# EAGLE board NCP1402_3.3V_Breakout-Panel-v10 (EAGLE 6.5.0)
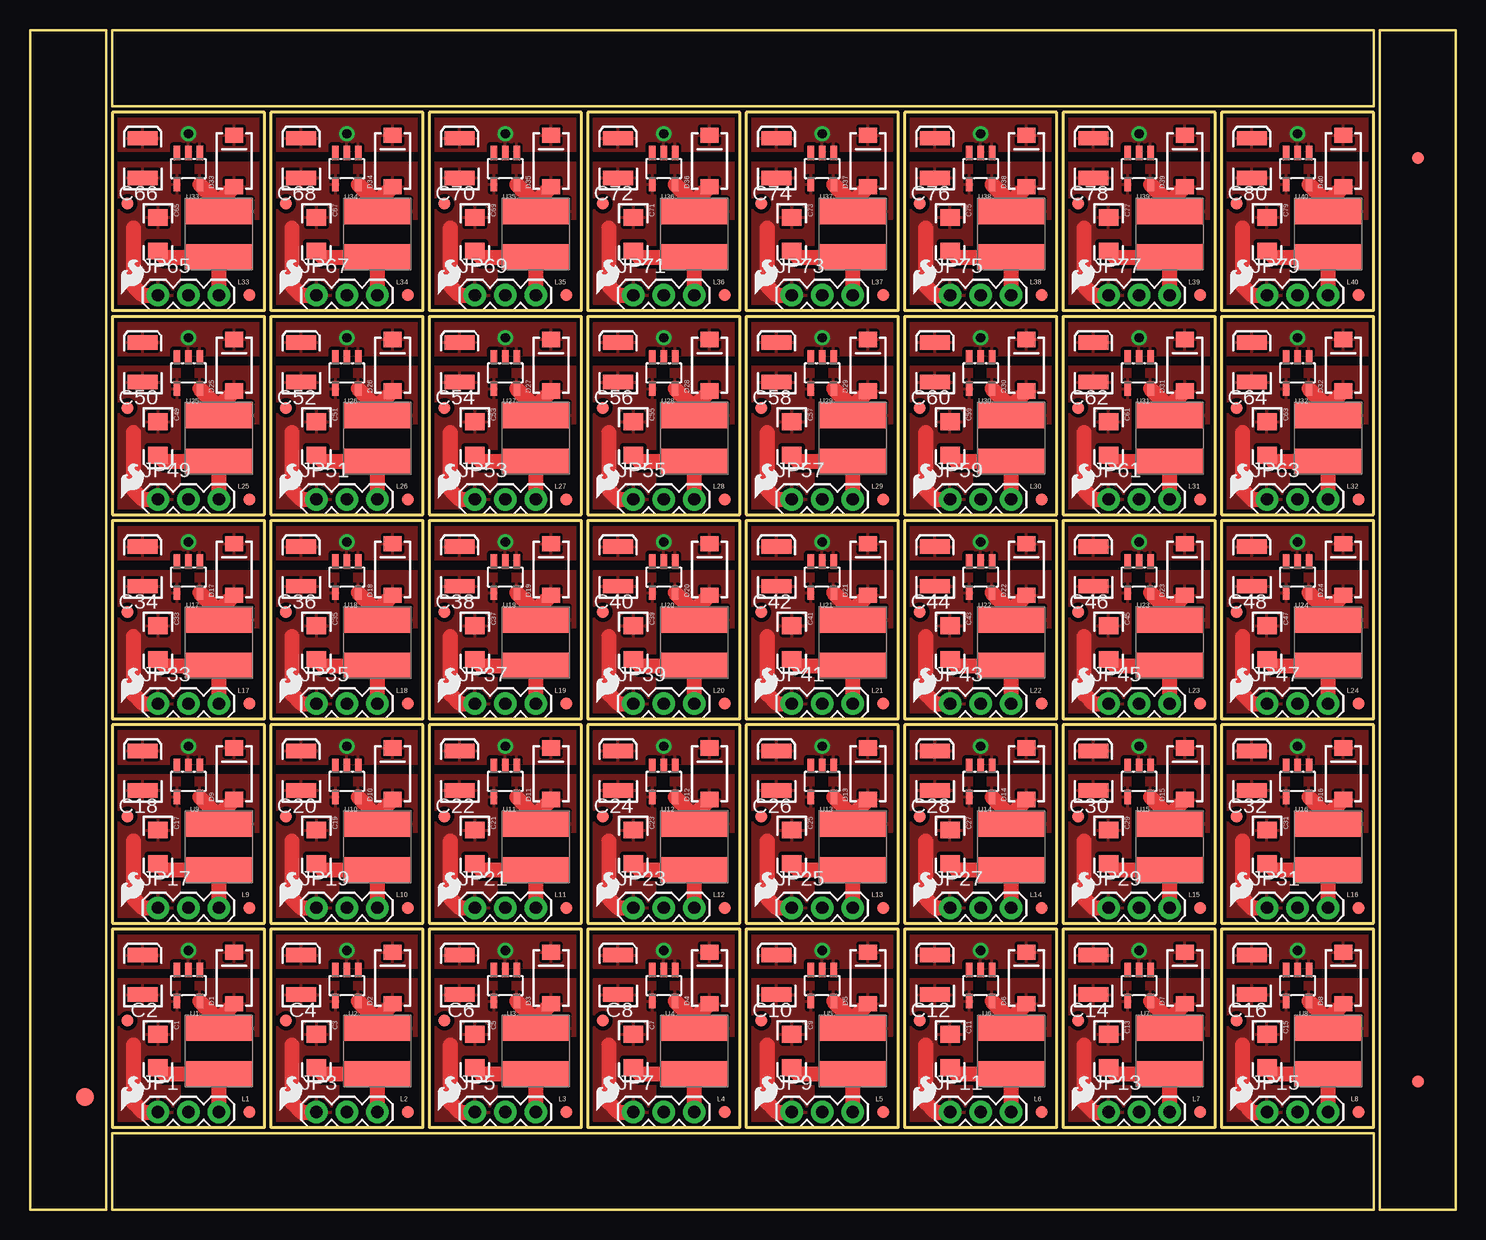
[diagram p0: board, top side]
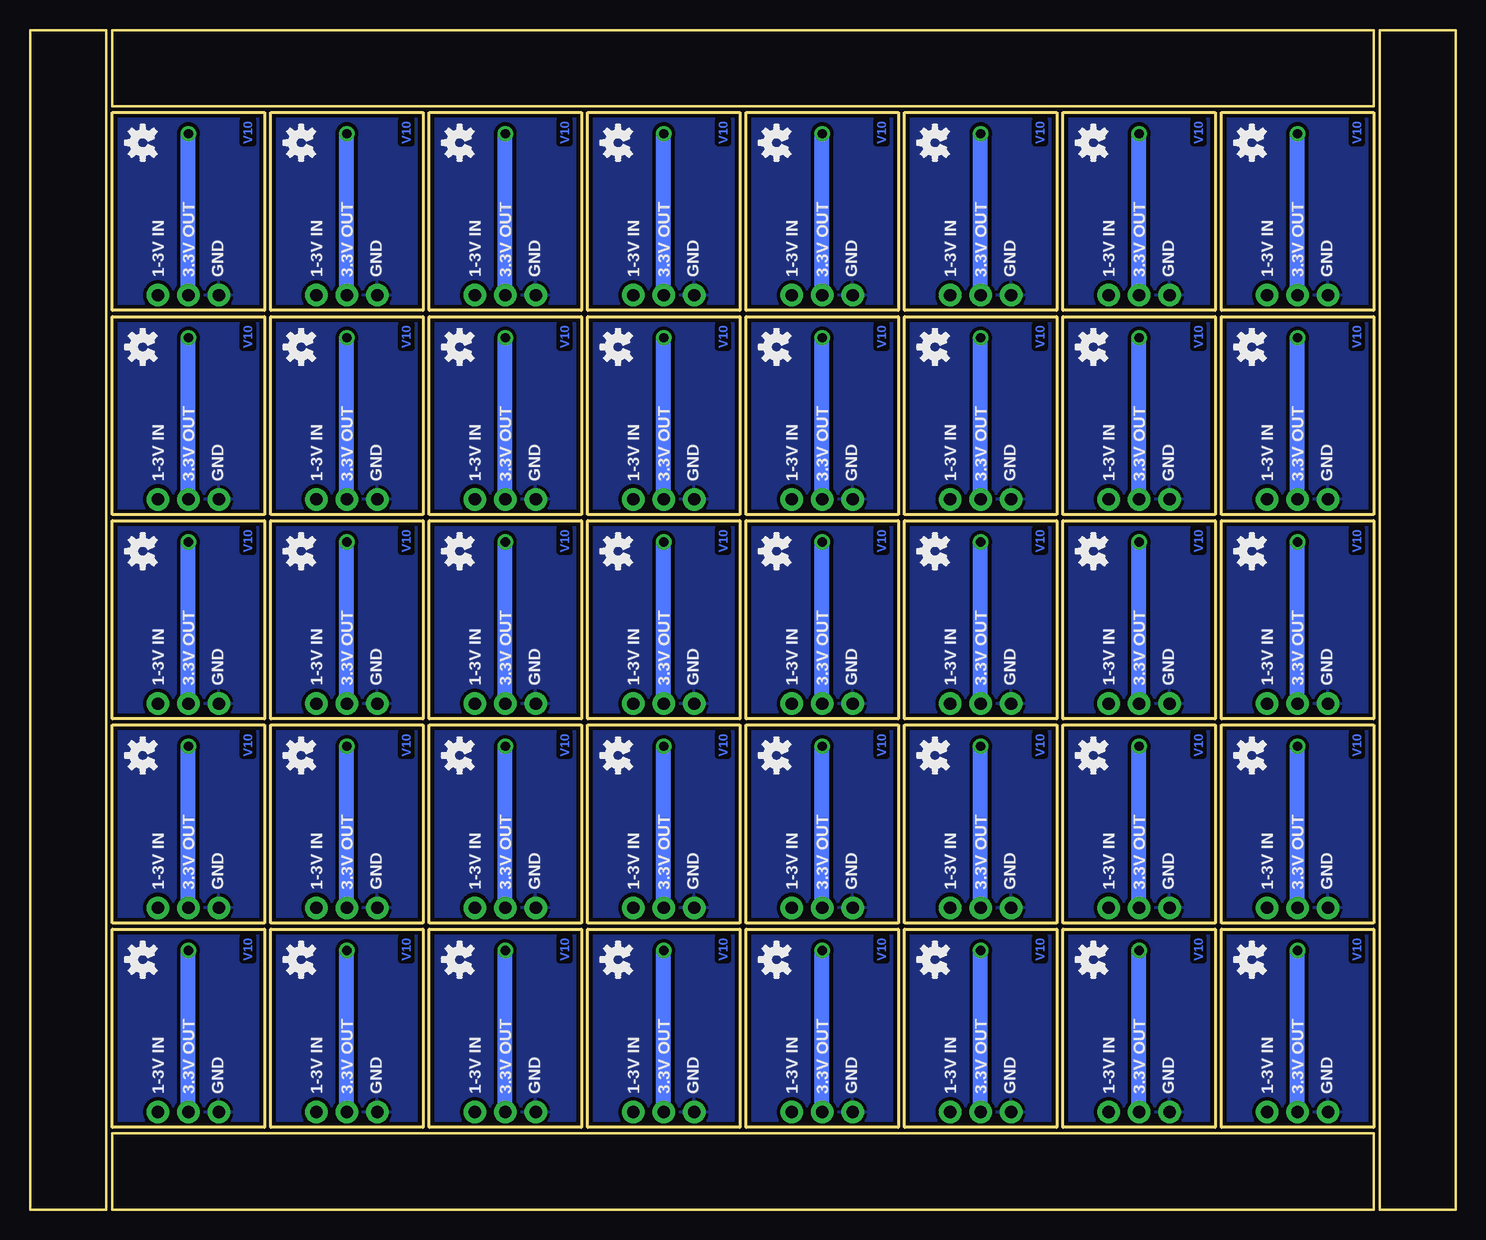
[diagram p1: board, bottom side, seen from below]

Size 118.87 x 98.3 mm. Coordinates in mm from the lower left corner, seen from the top.
Outline: 180 segments
Copper layers (1*16): Top 0.035mm / dielectric 1.5mm / Bottom 0.035mm
Design rules "SparkFun-2-layer *": minimum track width 7mil, minimum drill 15mil, track to track 8mil, track to pad 8mil, pad to pad 8mil, via to via 8mil, smd to smd 8mil, copper to edge 8mil, drill to drill 8mil, minimum pad ring 12mil, minimum via ring 10mil, stop-mask expansion 4mil, vias tented up to drill 31mil, thermal gap 10mil

## Footprints (pad centres in the part's own frame; a part is rotated, then mirrored left to right if it is on the bottom)
EIA3216 = smd 1.4 x 1.6: A 1.4,0; C -1.4,0
EIA3528 = smd 1.2 x 2.5: A 1.65,0; C -1.65,0
SMA-DIODE = smd 1.27 x 1.47: A -2.15,0; C 2.15,0
FIDUCIAL-1.5X3 = smd 1.5 x 1.5: 1 0,0
FIDUCIAL-1X2 = smd 1 x 1: 1 0,0
1X03 = drill 1.016 pad 1.88: 1 0,0; 2 2.54,0; 3 5.08,0
CR54 = smd 5.5 x 2.15: P$1 0,1.92; P$2 0,-1.92
SOT23-5 = smd 0.55 x 1.2: 1 -0.95,-1.3; 2 0,-1.3; 3 0.95,-1.3; 4 0.95,1.3; 5 -0.95,1.3

## Placement (x,y rotation side)
C1  10uF  [EIA3216]  10.67,13.21 270 top
C2  68uF  [EIA3528]  9.4,19.56 90 top
C3  10uF  [EIA3216]  23.88,13.21 270 top
C4  68uF  [EIA3528]  22.61,19.56 90 top
C5  10uF  [EIA3216]  37.08,13.21 270 top
C6  68uF  [EIA3528]  35.81,19.56 90 top
C7  10uF  [EIA3216]  50.29,13.21 270 top
C8  68uF  [EIA3528]  49.02,19.56 90 top
C9  10uF  [EIA3216]  63.5,13.21 270 top
C10  68uF  [EIA3528]  62.23,19.56 90 top
C11  10uF  [EIA3216]  76.71,13.21 270 top
C12  68uF  [EIA3528]  75.44,19.56 90 top
C13  10uF  [EIA3216]  89.92,13.21 270 top
C14  68uF  [EIA3528]  88.65,19.56 90 top
C15  10uF  [EIA3216]  103.12,13.21 270 top
C16  68uF  [EIA3528]  101.85,19.56 90 top
C17  10uF  [EIA3216]  10.67,30.23 270 top
C18  68uF  [EIA3528]  9.4,36.58 90 top
C19  10uF  [EIA3216]  23.88,30.23 270 top
C20  68uF  [EIA3528]  22.61,36.58 90 top
C21  10uF  [EIA3216]  37.08,30.23 270 top
C22  68uF  [EIA3528]  35.81,36.58 90 top
C23  10uF  [EIA3216]  50.29,30.23 270 top
C24  68uF  [EIA3528]  49.02,36.58 90 top
C25  10uF  [EIA3216]  63.5,30.23 270 top
C26  68uF  [EIA3528]  62.23,36.58 90 top
C27  10uF  [EIA3216]  76.71,30.23 270 top
C28  68uF  [EIA3528]  75.44,36.58 90 top
C29  10uF  [EIA3216]  89.92,30.23 270 top
C30  68uF  [EIA3528]  88.65,36.58 90 top
C31  10uF  [EIA3216]  103.12,30.23 270 top
C32  68uF  [EIA3528]  101.85,36.58 90 top
C33  10uF  [EIA3216]  10.67,47.24 270 top
C34  68uF  [EIA3528]  9.4,53.59 90 top
C35  10uF  [EIA3216]  23.88,47.24 270 top
C36  68uF  [EIA3528]  22.61,53.59 90 top
C37  10uF  [EIA3216]  37.08,47.24 270 top
C38  68uF  [EIA3528]  35.81,53.59 90 top
C39  10uF  [EIA3216]  50.29,47.24 270 top
C40  68uF  [EIA3528]  49.02,53.59 90 top
C41  10uF  [EIA3216]  63.5,47.24 270 top
C42  68uF  [EIA3528]  62.23,53.59 90 top
C43  10uF  [EIA3216]  76.71,47.24 270 top
C44  68uF  [EIA3528]  75.44,53.59 90 top
C45  10uF  [EIA3216]  89.92,47.24 270 top
C46  68uF  [EIA3528]  88.65,53.59 90 top
C47  10uF  [EIA3216]  103.12,47.24 270 top
C48  68uF  [EIA3528]  101.85,53.59 90 top
C49  10uF  [EIA3216]  10.67,64.26 270 top
C50  68uF  [EIA3528]  9.4,70.61 90 top
C51  10uF  [EIA3216]  23.88,64.26 270 top
C52  68uF  [EIA3528]  22.61,70.61 90 top
C53  10uF  [EIA3216]  37.08,64.26 270 top
C54  68uF  [EIA3528]  35.81,70.61 90 top
C55  10uF  [EIA3216]  50.29,64.26 270 top
C56  68uF  [EIA3528]  49.02,70.61 90 top
C57  10uF  [EIA3216]  63.5,64.26 270 top
C58  68uF  [EIA3528]  62.23,70.61 90 top
C59  10uF  [EIA3216]  76.71,64.26 270 top
C60  68uF  [EIA3528]  75.44,70.61 90 top
C61  10uF  [EIA3216]  89.92,64.26 270 top
C62  68uF  [EIA3528]  88.65,70.61 90 top
C63  10uF  [EIA3216]  103.12,64.26 270 top
C64  68uF  [EIA3528]  101.85,70.61 90 top
C65  10uF  [EIA3216]  10.67,81.28 270 top
C66  68uF  [EIA3528]  9.4,87.63 90 top
C67  10uF  [EIA3216]  23.88,81.28 270 top
C68  68uF  [EIA3528]  22.61,87.63 90 top
C69  10uF  [EIA3216]  37.08,81.28 270 top
C70  68uF  [EIA3528]  35.81,87.63 90 top
C71  10uF  [EIA3216]  50.29,81.28 270 top
C72  68uF  [EIA3528]  49.02,87.63 90 top
C73  10uF  [EIA3216]  63.5,81.28 270 top
C74  68uF  [EIA3528]  62.23,87.63 90 top
C75  10uF  [EIA3216]  76.71,81.28 270 top
C76  68uF  [EIA3528]  75.44,87.63 90 top
C77  10uF  [EIA3216]  89.92,81.28 270 top
C78  68uF  [EIA3528]  88.65,87.63 90 top
C79  10uF  [EIA3216]  103.12,81.28 270 top
C80  68uF  [EIA3528]  101.85,87.63 90 top
D1  MBRA140  [SMA-DIODE]  17.02,19.3 90 top
D2  MBRA140  [SMA-DIODE]  30.23,19.3 90 top
D3  MBRA140  [SMA-DIODE]  43.43,19.3 90 top
D4  MBRA140  [SMA-DIODE]  56.64,19.3 90 top
D5  MBRA140  [SMA-DIODE]  69.85,19.3 90 top
D6  MBRA140  [SMA-DIODE]  83.06,19.3 90 top
D7  MBRA140  [SMA-DIODE]  96.27,19.3 90 top
D8  MBRA140  [SMA-DIODE]  109.47,19.3 90 top
D9  MBRA140  [SMA-DIODE]  17.02,36.32 90 top
D10  MBRA140  [SMA-DIODE]  30.23,36.32 90 top
D11  MBRA140  [SMA-DIODE]  43.43,36.32 90 top
D12  MBRA140  [SMA-DIODE]  56.64,36.32 90 top
D13  MBRA140  [SMA-DIODE]  69.85,36.32 90 top
D14  MBRA140  [SMA-DIODE]  83.06,36.32 90 top
D15  MBRA140  [SMA-DIODE]  96.27,36.32 90 top
D16  MBRA140  [SMA-DIODE]  109.47,36.32 90 top
D17  MBRA140  [SMA-DIODE]  17.02,53.34 90 top
D18  MBRA140  [SMA-DIODE]  30.23,53.34 90 top
D19  MBRA140  [SMA-DIODE]  43.43,53.34 90 top
D20  MBRA140  [SMA-DIODE]  56.64,53.34 90 top
D21  MBRA140  [SMA-DIODE]  69.85,53.34 90 top
D22  MBRA140  [SMA-DIODE]  83.06,53.34 90 top
D23  MBRA140  [SMA-DIODE]  96.27,53.34 90 top
D24  MBRA140  [SMA-DIODE]  109.47,53.34 90 top
D25  MBRA140  [SMA-DIODE]  17.02,70.36 90 top
D26  MBRA140  [SMA-DIODE]  30.23,70.36 90 top
D27  MBRA140  [SMA-DIODE]  43.43,70.36 90 top
D28  MBRA140  [SMA-DIODE]  56.64,70.36 90 top
D29  MBRA140  [SMA-DIODE]  69.85,70.36 90 top
D30  MBRA140  [SMA-DIODE]  83.06,70.36 90 top
D31  MBRA140  [SMA-DIODE]  96.27,70.36 90 top
D32  MBRA140  [SMA-DIODE]  109.47,70.36 90 top
D33  MBRA140  [SMA-DIODE]  17.02,87.38 90 top
D34  MBRA140  [SMA-DIODE]  30.23,87.38 90 top
D35  MBRA140  [SMA-DIODE]  43.43,87.38 90 top
D36  MBRA140  [SMA-DIODE]  56.64,87.38 90 top
D37  MBRA140  [SMA-DIODE]  69.85,87.38 90 top
D38  MBRA140  [SMA-DIODE]  83.06,87.38 90 top
D39  MBRA140  [SMA-DIODE]  96.27,87.38 90 top
D40  MBRA140  [SMA-DIODE]  109.47,87.38 90 top
E$1  [FIDUCIAL-1.5X3]  4.57,9.4 0 top
E$4  [FIDUCIAL-1X2]  115.7,10.67 0 top
E$6  [FIDUCIAL-1X2]  115.7,87.63 180 top
FID1  FIDUCIAL1X2  [FIDUCIAL-1X2]  18.29,8.13 0 top
FID2  FIDUCIAL1X2  [FIDUCIAL-1X2]  8.13,15.75 0 top
FID3  FIDUCIAL1X2  [FIDUCIAL-1X2]  31.5,8.13 0 top
FID4  FIDUCIAL1X2  [FIDUCIAL-1X2]  21.34,15.75 0 top
FID5  FIDUCIAL1X2  [FIDUCIAL-1X2]  44.7,8.13 0 top
FID6  FIDUCIAL1X2  [FIDUCIAL-1X2]  34.54,15.75 0 top
FID7  FIDUCIAL1X2  [FIDUCIAL-1X2]  57.91,8.13 0 top
FID8  FIDUCIAL1X2  [FIDUCIAL-1X2]  47.75,15.75 0 top
FID9  FIDUCIAL1X2  [FIDUCIAL-1X2]  71.12,8.13 0 top
FID10  FIDUCIAL1X2  [FIDUCIAL-1X2]  60.96,15.75 0 top
FID11  FIDUCIAL1X2  [FIDUCIAL-1X2]  84.33,8.13 0 top
FID12  FIDUCIAL1X2  [FIDUCIAL-1X2]  74.17,15.75 0 top
FID13  FIDUCIAL1X2  [FIDUCIAL-1X2]  97.54,8.13 0 top
FID14  FIDUCIAL1X2  [FIDUCIAL-1X2]  87.38,15.75 0 top
FID15  FIDUCIAL1X2  [FIDUCIAL-1X2]  110.74,8.13 0 top
FID16  FIDUCIAL1X2  [FIDUCIAL-1X2]  100.58,15.75 0 top
FID17  FIDUCIAL1X2  [FIDUCIAL-1X2]  18.29,25.15 0 top
FID18  FIDUCIAL1X2  [FIDUCIAL-1X2]  8.13,32.77 0 top
FID19  FIDUCIAL1X2  [FIDUCIAL-1X2]  31.5,25.15 0 top
FID20  FIDUCIAL1X2  [FIDUCIAL-1X2]  21.34,32.77 0 top
FID21  FIDUCIAL1X2  [FIDUCIAL-1X2]  44.7,25.15 0 top
FID22  FIDUCIAL1X2  [FIDUCIAL-1X2]  34.54,32.77 0 top
FID23  FIDUCIAL1X2  [FIDUCIAL-1X2]  57.91,25.15 0 top
FID24  FIDUCIAL1X2  [FIDUCIAL-1X2]  47.75,32.77 0 top
FID25  FIDUCIAL1X2  [FIDUCIAL-1X2]  71.12,25.15 0 top
FID26  FIDUCIAL1X2  [FIDUCIAL-1X2]  60.96,32.77 0 top
FID27  FIDUCIAL1X2  [FIDUCIAL-1X2]  84.33,25.15 0 top
FID28  FIDUCIAL1X2  [FIDUCIAL-1X2]  74.17,32.77 0 top
FID29  FIDUCIAL1X2  [FIDUCIAL-1X2]  97.54,25.15 0 top
FID30  FIDUCIAL1X2  [FIDUCIAL-1X2]  87.38,32.77 0 top
FID31  FIDUCIAL1X2  [FIDUCIAL-1X2]  110.74,25.15 0 top
FID32  FIDUCIAL1X2  [FIDUCIAL-1X2]  100.58,32.77 0 top
FID33  FIDUCIAL1X2  [FIDUCIAL-1X2]  18.29,42.16 0 top
FID34  FIDUCIAL1X2  [FIDUCIAL-1X2]  8.13,49.78 0 top
FID35  FIDUCIAL1X2  [FIDUCIAL-1X2]  31.5,42.16 0 top
FID36  FIDUCIAL1X2  [FIDUCIAL-1X2]  21.34,49.78 0 top
FID37  FIDUCIAL1X2  [FIDUCIAL-1X2]  44.7,42.16 0 top
FID38  FIDUCIAL1X2  [FIDUCIAL-1X2]  34.54,49.78 0 top
FID39  FIDUCIAL1X2  [FIDUCIAL-1X2]  57.91,42.16 0 top
FID40  FIDUCIAL1X2  [FIDUCIAL-1X2]  47.75,49.78 0 top
FID41  FIDUCIAL1X2  [FIDUCIAL-1X2]  71.12,42.16 0 top
FID42  FIDUCIAL1X2  [FIDUCIAL-1X2]  60.96,49.78 0 top
FID43  FIDUCIAL1X2  [FIDUCIAL-1X2]  84.33,42.16 0 top
FID44  FIDUCIAL1X2  [FIDUCIAL-1X2]  74.17,49.78 0 top
FID45  FIDUCIAL1X2  [FIDUCIAL-1X2]  97.54,42.16 0 top
FID46  FIDUCIAL1X2  [FIDUCIAL-1X2]  87.38,49.78 0 top
FID47  FIDUCIAL1X2  [FIDUCIAL-1X2]  110.74,42.16 0 top
FID48  FIDUCIAL1X2  [FIDUCIAL-1X2]  100.58,49.78 0 top
FID49  FIDUCIAL1X2  [FIDUCIAL-1X2]  18.29,59.18 0 top
FID50  FIDUCIAL1X2  [FIDUCIAL-1X2]  8.13,66.8 0 top
FID51  FIDUCIAL1X2  [FIDUCIAL-1X2]  31.5,59.18 0 top
FID52  FIDUCIAL1X2  [FIDUCIAL-1X2]  21.34,66.8 0 top
FID53  FIDUCIAL1X2  [FIDUCIAL-1X2]  44.7,59.18 0 top
FID54  FIDUCIAL1X2  [FIDUCIAL-1X2]  34.54,66.8 0 top
FID55  FIDUCIAL1X2  [FIDUCIAL-1X2]  57.91,59.18 0 top
FID56  FIDUCIAL1X2  [FIDUCIAL-1X2]  47.75,66.8 0 top
FID57  FIDUCIAL1X2  [FIDUCIAL-1X2]  71.12,59.18 0 top
FID58  FIDUCIAL1X2  [FIDUCIAL-1X2]  60.96,66.8 0 top
FID59  FIDUCIAL1X2  [FIDUCIAL-1X2]  84.33,59.18 0 top
FID60  FIDUCIAL1X2  [FIDUCIAL-1X2]  74.17,66.8 0 top
FID61  FIDUCIAL1X2  [FIDUCIAL-1X2]  97.54,59.18 0 top
FID62  FIDUCIAL1X2  [FIDUCIAL-1X2]  87.38,66.8 0 top
FID63  FIDUCIAL1X2  [FIDUCIAL-1X2]  110.74,59.18 0 top
FID64  FIDUCIAL1X2  [FIDUCIAL-1X2]  100.58,66.8 0 top
FID65  FIDUCIAL1X2  [FIDUCIAL-1X2]  18.29,76.2 0 top
FID66  FIDUCIAL1X2  [FIDUCIAL-1X2]  8.13,83.82 0 top
FID67  FIDUCIAL1X2  [FIDUCIAL-1X2]  31.5,76.2 0 top
FID68  FIDUCIAL1X2  [FIDUCIAL-1X2]  21.34,83.82 0 top
FID69  FIDUCIAL1X2  [FIDUCIAL-1X2]  44.7,76.2 0 top
FID70  FIDUCIAL1X2  [FIDUCIAL-1X2]  34.54,83.82 0 top
FID71  FIDUCIAL1X2  [FIDUCIAL-1X2]  57.91,76.2 0 top
FID72  FIDUCIAL1X2  [FIDUCIAL-1X2]  47.75,83.82 0 top
FID73  FIDUCIAL1X2  [FIDUCIAL-1X2]  71.12,76.2 0 top
FID74  FIDUCIAL1X2  [FIDUCIAL-1X2]  60.96,83.82 0 top
FID75  FIDUCIAL1X2  [FIDUCIAL-1X2]  84.33,76.2 0 top
FID76  FIDUCIAL1X2  [FIDUCIAL-1X2]  74.17,83.82 0 top
FID77  FIDUCIAL1X2  [FIDUCIAL-1X2]  97.54,76.2 0 top
FID78  FIDUCIAL1X2  [FIDUCIAL-1X2]  87.38,83.82 0 top
FID79  FIDUCIAL1X2  [FIDUCIAL-1X2]  110.74,76.2 0 top
FID80  FIDUCIAL1X2  [FIDUCIAL-1X2]  100.58,83.82 0 top
JP1  [1X03]  10.67,8.13 0 top
JP2  LOGO-SFESK  [SFE-LOGO-FLAME]  7.62,8.26 0 top
JP3  [1X03]  23.88,8.13 0 top
JP4  LOGO-SFESK  [SFE-LOGO-FLAME]  20.83,8.26 0 top
JP5  [1X03]  37.08,8.13 0 top
JP6  LOGO-SFESK  [SFE-LOGO-FLAME]  34.04,8.26 0 top
JP7  [1X03]  50.29,8.13 0 top
JP8  LOGO-SFESK  [SFE-LOGO-FLAME]  47.24,8.26 0 top
JP9  [1X03]  63.5,8.13 0 top
JP10  LOGO-SFESK  [SFE-LOGO-FLAME]  60.45,8.26 0 top
JP11  [1X03]  76.71,8.13 0 top
JP12  LOGO-SFESK  [SFE-LOGO-FLAME]  73.66,8.26 0 top
JP13  [1X03]  89.92,8.13 0 top
JP14  LOGO-SFESK  [SFE-LOGO-FLAME]  86.87,8.26 0 top
JP15  [1X03]  103.12,8.13 0 top
JP16  LOGO-SFESK  [SFE-LOGO-FLAME]  100.08,8.26 0 top
JP17  [1X03]  10.67,25.15 0 top
JP18  LOGO-SFESK  [SFE-LOGO-FLAME]  7.62,25.27 0 top
JP19  [1X03]  23.88,25.15 0 top
JP20  LOGO-SFESK  [SFE-LOGO-FLAME]  20.83,25.27 0 top
JP21  [1X03]  37.08,25.15 0 top
JP22  LOGO-SFESK  [SFE-LOGO-FLAME]  34.04,25.27 0 top
JP23  [1X03]  50.29,25.15 0 top
JP24  LOGO-SFESK  [SFE-LOGO-FLAME]  47.24,25.27 0 top
JP25  [1X03]  63.5,25.15 0 top
JP26  LOGO-SFESK  [SFE-LOGO-FLAME]  60.45,25.27 0 top
JP27  [1X03]  76.71,25.15 0 top
JP28  LOGO-SFESK  [SFE-LOGO-FLAME]  73.66,25.27 0 top
JP29  [1X03]  89.92,25.15 0 top
JP30  LOGO-SFESK  [SFE-LOGO-FLAME]  86.87,25.27 0 top
JP31  [1X03]  103.12,25.15 0 top
JP32  LOGO-SFESK  [SFE-LOGO-FLAME]  100.08,25.27 0 top
JP33  [1X03]  10.67,42.16 0 top
JP34  LOGO-SFESK  [SFE-LOGO-FLAME]  7.62,42.29 0 top
JP35  [1X03]  23.88,42.16 0 top
JP36  LOGO-SFESK  [SFE-LOGO-FLAME]  20.83,42.29 0 top
JP37  [1X03]  37.08,42.16 0 top
JP38  LOGO-SFESK  [SFE-LOGO-FLAME]  34.04,42.29 0 top
JP39  [1X03]  50.29,42.16 0 top
JP40  LOGO-SFESK  [SFE-LOGO-FLAME]  47.24,42.29 0 top
JP41  [1X03]  63.5,42.16 0 top
JP42  LOGO-SFESK  [SFE-LOGO-FLAME]  60.45,42.29 0 top
JP43  [1X03]  76.71,42.16 0 top
JP44  LOGO-SFESK  [SFE-LOGO-FLAME]  73.66,42.29 0 top
JP45  [1X03]  89.92,42.16 0 top
JP46  LOGO-SFESK  [SFE-LOGO-FLAME]  86.87,42.29 0 top
JP47  [1X03]  103.12,42.16 0 top
JP48  LOGO-SFESK  [SFE-LOGO-FLAME]  100.08,42.29 0 top
JP49  [1X03]  10.67,59.18 0 top
JP50  LOGO-SFESK  [SFE-LOGO-FLAME]  7.62,59.31 0 top
JP51  [1X03]  23.88,59.18 0 top
JP52  LOGO-SFESK  [SFE-LOGO-FLAME]  20.83,59.31 0 top
JP53  [1X03]  37.08,59.18 0 top
JP54  LOGO-SFESK  [SFE-LOGO-FLAME]  34.04,59.31 0 top
JP55  [1X03]  50.29,59.18 0 top
JP56  LOGO-SFESK  [SFE-LOGO-FLAME]  47.24,59.31 0 top
JP57  [1X03]  63.5,59.18 0 top
JP58  LOGO-SFESK  [SFE-LOGO-FLAME]  60.45,59.31 0 top
JP59  [1X03]  76.71,59.18 0 top
JP60  LOGO-SFESK  [SFE-LOGO-FLAME]  73.66,59.31 0 top
JP61  [1X03]  89.92,59.18 0 top
JP62  LOGO-SFESK  [SFE-LOGO-FLAME]  86.87,59.31 0 top
JP63  [1X03]  103.12,59.18 0 top
JP64  LOGO-SFESK  [SFE-LOGO-FLAME]  100.08,59.31 0 top
JP65  [1X03]  10.67,76.2 0 top
JP66  LOGO-SFESK  [SFE-LOGO-FLAME]  7.62,76.33 0 top
JP67  [1X03]  23.88,76.2 0 top
JP68  LOGO-SFESK  [SFE-LOGO-FLAME]  20.83,76.33 0 top
JP69  [1X03]  37.08,76.2 0 top
JP70  LOGO-SFESK  [SFE-LOGO-FLAME]  34.04,76.33 0 top
JP71  [1X03]  50.29,76.2 0 top
JP72  LOGO-SFESK  [SFE-LOGO-FLAME]  47.24,76.33 0 top
JP73  [1X03]  63.5,76.2 0 top
JP74  LOGO-SFESK  [SFE-LOGO-FLAME]  60.45,76.33 0 top
JP75  [1X03]  76.71,76.2 0 top
JP76  LOGO-SFESK  [SFE-LOGO-FLAME]  73.66,76.33 0 top
JP77  [1X03]  89.92,76.2 0 top
JP78  LOGO-SFESK  [SFE-LOGO-FLAME]  86.87,76.33 0 top
JP79  [1X03]  103.12,76.2 0 top
JP80  LOGO-SFESK  [SFE-LOGO-FLAME]  100.08,76.33 0 top
L1  47uH  [CR54]  15.75,13.21 180 top
L2  47uH  [CR54]  28.96,13.21 180 top
L3  47uH  [CR54]  42.16,13.21 180 top
L4  47uH  [CR54]  55.37,13.21 180 top
L5  47uH  [CR54]  68.58,13.21 180 top
L6  47uH  [CR54]  81.79,13.21 180 top
L7  47uH  [CR54]  95,13.21 180 top
L8  47uH  [CR54]  108.2,13.21 180 top
L9  47uH  [CR54]  15.75,30.23 180 top
L10  47uH  [CR54]  28.96,30.23 180 top
L11  47uH  [CR54]  42.16,30.23 180 top
L12  47uH  [CR54]  55.37,30.23 180 top
L13  47uH  [CR54]  68.58,30.23 180 top
L14  47uH  [CR54]  81.79,30.23 180 top
L15  47uH  [CR54]  95,30.23 180 top
L16  47uH  [CR54]  108.2,30.23 180 top
L17  47uH  [CR54]  15.75,47.24 180 top
L18  47uH  [CR54]  28.96,47.24 180 top
L19  47uH  [CR54]  42.16,47.24 180 top
L20  47uH  [CR54]  55.37,47.24 180 top
L21  47uH  [CR54]  68.58,47.24 180 top
L22  47uH  [CR54]  81.79,47.24 180 top
L23  47uH  [CR54]  95,47.24 180 top
L24  47uH  [CR54]  108.2,47.24 180 top
L25  47uH  [CR54]  15.75,64.26 180 top
L26  47uH  [CR54]  28.96,64.26 180 top
L27  47uH  [CR54]  42.16,64.26 180 top
L28  47uH  [CR54]  55.37,64.26 180 top
L29  47uH  [CR54]  68.58,64.26 180 top
L30  47uH  [CR54]  81.79,64.26 180 top
L31  47uH  [CR54]  95,64.26 180 top
L32  47uH  [CR54]  108.2,64.26 180 top
L33  47uH  [CR54]  15.75,81.28 180 top
L34  47uH  [CR54]  28.96,81.28 180 top
L35  47uH  [CR54]  42.16,81.28 180 top
L36  47uH  [CR54]  55.37,81.28 180 top
L37  47uH  [CR54]  68.58,81.28 180 top
L38  47uH  [CR54]  81.79,81.28 180 top
L39  47uH  [CR54]  95,81.28 180 top
L40  47uH  [CR54]  108.2,81.28 180 top
U1  NCP1402  [SOT23-5]  13.21,18.67 180 top
U2  NCP1402  [SOT23-5]  26.42,18.67 180 top
U3  NCP1402  [SOT23-5]  39.62,18.67 180 top
U4  NCP1402  [SOT23-5]  52.83,18.67 180 top
U5  NCP1402  [SOT23-5]  66.04,18.67 180 top
U6  NCP1402  [SOT23-5]  79.25,18.67 180 top
U7  NCP1402  [SOT23-5]  92.46,18.67 180 top
U8  NCP1402  [SOT23-5]  105.66,18.67 180 top
U9  NCP1402  [SOT23-5]  13.21,35.69 180 top
U10  NCP1402  [SOT23-5]  26.42,35.69 180 top
U11  NCP1402  [SOT23-5]  39.62,35.69 180 top
U12  NCP1402  [SOT23-5]  52.83,35.69 180 top
U13  NCP1402  [SOT23-5]  66.04,35.69 180 top
U14  NCP1402  [SOT23-5]  79.25,35.69 180 top
U15  NCP1402  [SOT23-5]  92.46,35.69 180 top
U16  NCP1402  [SOT23-5]  105.66,35.69 180 top
U17  NCP1402  [SOT23-5]  13.21,52.7 180 top
U18  NCP1402  [SOT23-5]  26.42,52.7 180 top
U19  NCP1402  [SOT23-5]  39.62,52.7 180 top
U20  NCP1402  [SOT23-5]  52.83,52.7 180 top
U21  NCP1402  [SOT23-5]  66.04,52.7 180 top
U22  NCP1402  [SOT23-5]  79.25,52.7 180 top
U23  NCP1402  [SOT23-5]  92.46,52.7 180 top
U24  NCP1402  [SOT23-5]  105.66,52.7 180 top
U25  NCP1402  [SOT23-5]  13.21,69.72 180 top
U26  NCP1402  [SOT23-5]  26.42,69.72 180 top
U27  NCP1402  [SOT23-5]  39.62,69.72 180 top
U28  NCP1402  [SOT23-5]  52.83,69.72 180 top
U29  NCP1402  [SOT23-5]  66.04,69.72 180 top
U30  NCP1402  [SOT23-5]  79.25,69.72 180 top
U31  NCP1402  [SOT23-5]  92.46,69.72 180 top
U32  NCP1402  [SOT23-5]  105.66,69.72 180 top
U33  NCP1402  [SOT23-5]  13.21,86.74 180 top
U34  NCP1402  [SOT23-5]  26.42,86.74 180 top
U35  NCP1402  [SOT23-5]  39.62,86.74 180 top
U36  NCP1402  [SOT23-5]  52.83,86.74 180 top
U37  NCP1402  [SOT23-5]  66.04,86.74 180 top
U38  NCP1402  [SOT23-5]  79.25,86.74 180 top
U39  NCP1402  [SOT23-5]  92.46,86.74 180 top
U40  NCP1402  [SOT23-5]  105.66,86.74 180 top
U$1  OSHW-LOGOS  [OSHW-LOGO-S]  17.02,20.83 90 bottom
U$2  OSHW-LOGOS  [OSHW-LOGO-S]  30.23,20.83 90 bottom
U$3  OSHW-LOGOS  [OSHW-LOGO-S]  43.43,20.83 90 bottom
U$4  OSHW-LOGOS  [OSHW-LOGO-S]  56.64,20.83 90 bottom
U$5  OSHW-LOGOS  [OSHW-LOGO-S]  69.85,20.83 90 bottom
U$6  OSHW-LOGOS  [OSHW-LOGO-S]  83.06,20.83 90 bottom
U$7  OSHW-LOGOS  [OSHW-LOGO-S]  96.27,20.83 90 bottom
U$8  OSHW-LOGOS  [OSHW-LOGO-S]  109.47,20.83 90 bottom
U$9  OSHW-LOGOS  [OSHW-LOGO-S]  17.02,37.85 90 bottom
U$10  OSHW-LOGOS  [OSHW-LOGO-S]  30.23,37.85 90 bottom
U$11  OSHW-LOGOS  [OSHW-LOGO-S]  43.43,37.85 90 bottom
U$12  OSHW-LOGOS  [OSHW-LOGO-S]  56.64,37.85 90 bottom
U$13  OSHW-LOGOS  [OSHW-LOGO-S]  69.85,37.85 90 bottom
U$14  OSHW-LOGOS  [OSHW-LOGO-S]  83.06,37.85 90 bottom
U$15  OSHW-LOGOS  [OSHW-LOGO-S]  96.27,37.85 90 bottom
U$16  OSHW-LOGOS  [OSHW-LOGO-S]  109.47,37.85 90 bottom
U$17  OSHW-LOGOS  [OSHW-LOGO-S]  17.02,54.86 90 bottom
U$18  OSHW-LOGOS  [OSHW-LOGO-S]  30.23,54.86 90 bottom
U$19  OSHW-LOGOS  [OSHW-LOGO-S]  43.43,54.86 90 bottom
U$20  OSHW-LOGOS  [OSHW-LOGO-S]  56.64,54.86 90 bottom
U$21  OSHW-LOGOS  [OSHW-LOGO-S]  69.85,54.86 90 bottom
U$22  OSHW-LOGOS  [OSHW-LOGO-S]  83.06,54.86 90 bottom
U$23  OSHW-LOGOS  [OSHW-LOGO-S]  96.27,54.86 90 bottom
U$24  OSHW-LOGOS  [OSHW-LOGO-S]  109.47,54.86 90 bottom
U$25  OSHW-LOGOS  [OSHW-LOGO-S]  17.02,71.88 90 bottom
U$26  OSHW-LOGOS  [OSHW-LOGO-S]  30.23,71.88 90 bottom
U$27  OSHW-LOGOS  [OSHW-LOGO-S]  43.43,71.88 90 bottom
U$28  OSHW-LOGOS  [OSHW-LOGO-S]  56.64,71.88 90 bottom
U$29  OSHW-LOGOS  [OSHW-LOGO-S]  69.85,71.88 90 bottom
U$30  OSHW-LOGOS  [OSHW-LOGO-S]  83.06,71.88 90 bottom
U$31  OSHW-LOGOS  [OSHW-LOGO-S]  96.27,71.88 90 bottom
U$32  OSHW-LOGOS  [OSHW-LOGO-S]  109.47,71.88 90 bottom
U$33  OSHW-LOGOS  [OSHW-LOGO-S]  17.02,88.9 90 bottom
U$34  OSHW-LOGOS  [OSHW-LOGO-S]  30.23,88.9 90 bottom
U$35  OSHW-LOGOS  [OSHW-LOGO-S]  43.43,88.9 90 bottom
U$36  OSHW-LOGOS  [OSHW-LOGO-S]  56.64,88.9 90 bottom
U$37  OSHW-LOGOS  [OSHW-LOGO-S]  69.85,88.9 90 bottom
U$38  OSHW-LOGOS  [OSHW-LOGO-S]  83.06,88.9 90 bottom
U$39  OSHW-LOGOS  [OSHW-LOGO-S]  96.27,88.9 90 bottom
U$40  OSHW-LOGOS  [OSHW-LOGO-S]  109.47,88.9 90 bottom

## Library data of the parts
C1-C80 D1-D40 JP2 JP4 JP6 JP8 JP10 JP12 JP14 JP16 JP18 JP20 JP22 JP24 JP26 JP28 JP30 JP32 JP34 JP36 JP38 JP40 JP42 JP44 JP46 JP48 JP50 JP52 JP54 JP56 JP58 JP60 JP62 JP64 JP66 JP68 JP70 JP72 JP74 JP76 JP78 JP80 L1-L40 U1-U40 U$1-U$40 = SparkFun
E$1 = SparkFun-Retired
E$4 E$6 FID1-FID80 = SparkFun-Aesthetics
JP1 JP3 JP5 JP7 JP9 JP11 JP13 JP15 JP17 JP19 JP21 JP23 JP25 JP27 JP29 JP31 JP33 JP35 JP37 JP39 JP41 JP43 JP45 JP47 JP49 JP51 JP53 JP55 JP57 JP59 JP61 JP63 JP65 JP67 JP69 JP71 JP73 JP75 JP77 JP79 = SparkFun-Connectors

## Nets
GND: C1.C C2.C JP1.1 U1.4
GND1: C3.C C4.C JP3.1 U2.4
GND2: C5.C C6.C JP5.1 U3.4
GND3: C7.C C8.C JP7.1 U4.4
GND4: C9.C C10.C JP9.1 U5.4
GND5: C11.C C12.C JP11.1 U6.4
GND6: C13.C C14.C JP13.1 U7.4
GND7: C15.C C16.C JP15.1 U8.4
GND8: C17.C C18.C JP17.1 U9.4
GND9: C19.C C20.C JP19.1 U10.4
GND10: C21.C C22.C JP21.1 U11.4
GND11: C23.C C24.C JP23.1 U12.4
GND12: C25.C C26.C JP25.1 U13.4
GND13: C27.C C28.C JP27.1 U14.4
GND14: C29.C C30.C JP29.1 U15.4
GND15: C31.C C32.C JP31.1 U16.4
GND16: C33.C C34.C JP33.1 U17.4
GND17: C35.C C36.C JP35.1 U18.4
GND18: C37.C C38.C JP37.1 U19.4
GND19: C39.C C40.C JP39.1 U20.4
GND20: C41.C C42.C JP41.1 U21.4
GND21: C43.C C44.C JP43.1 U22.4
GND22: C45.C C46.C JP45.1 U23.4
GND23: C47.C C48.C JP47.1 U24.4
GND24: C49.C C50.C JP49.1 U25.4
GND25: C51.C C52.C JP51.1 U26.4
GND26: C53.C C54.C JP53.1 U27.4
GND27: C55.C C56.C JP55.1 U28.4
GND28: C57.C C58.C JP57.1 U29.4
GND29: C59.C C60.C JP59.1 U30.4
GND30: C61.C C62.C JP61.1 U31.4
GND31: C63.C C64.C JP63.1 U32.4
GND32: C65.C C66.C JP65.1 U33.4
GND33: C67.C C68.C JP67.1 U34.4
GND34: C69.C C70.C JP69.1 U35.4
GND35: C71.C C72.C JP71.1 U36.4
GND36: C73.C C74.C JP73.1 U37.4
GND37: C75.C C76.C JP75.1 U38.4
GND38: C77.C C78.C JP77.1 U39.4
GND39: C79.C C80.C JP79.1 U40.4
N$1: D2.A L2.P$2 U2.5
N$2: D3.A L3.P$2 U3.5
N$3: D1.A L1.P$2 U1.5
N$4: D4.A L4.P$2 U4.5
N$5: D5.A L5.P$2 U5.5
N$6: D6.A L6.P$2 U6.5
N$7: D7.A L7.P$2 U7.5
N$8: D8.A L8.P$2 U8.5
N$9: D9.A L9.P$2 U9.5
N$10: D10.A L10.P$2 U10.5
N$11: D11.A L11.P$2 U11.5
N$12: D12.A L12.P$2 U12.5
N$13: D13.A L13.P$2 U13.5
N$14: D14.A L14.P$2 U14.5
N$15: D15.A L15.P$2 U15.5
N$16: D16.A L16.P$2 U16.5
N$17: D17.A L17.P$2 U17.5
N$18: D18.A L18.P$2 U18.5
N$19: D19.A L19.P$2 U19.5
N$20: D20.A L20.P$2 U20.5
N$21: D21.A L21.P$2 U21.5
N$22: D22.A L22.P$2 U22.5
N$23: D23.A L23.P$2 U23.5
N$24: D24.A L24.P$2 U24.5
N$25: D25.A L25.P$2 U25.5
N$26: D26.A L26.P$2 U26.5
N$27: D27.A L27.P$2 U27.5
N$28: D28.A L28.P$2 U28.5
N$29: D29.A L29.P$2 U29.5
N$30: D30.A L30.P$2 U30.5
N$31: D31.A L31.P$2 U31.5
N$32: D32.A L32.P$2 U32.5
N$33: D33.A L33.P$2 U33.5
N$34: D34.A L34.P$2 U34.5
N$35: D35.A L35.P$2 U35.5
N$36: D36.A L36.P$2 U36.5
N$37: D37.A L37.P$2 U37.5
N$38: D38.A L38.P$2 U38.5
N$39: D39.A L39.P$2 U39.5
N$40: D40.A L40.P$2 U40.5
VIN: C1.A JP1.3 L1.P$1
VIN1: C3.A JP3.3 L2.P$1
VIN2: C5.A JP5.3 L3.P$1
VIN3: C7.A JP7.3 L4.P$1
VIN4: C9.A JP9.3 L5.P$1
VIN5: C11.A JP11.3 L6.P$1
VIN6: C13.A JP13.3 L7.P$1
VIN7: C15.A JP15.3 L8.P$1
VIN8: C17.A JP17.3 L9.P$1
VIN9: C19.A JP19.3 L10.P$1
VIN10: C21.A JP21.3 L11.P$1
VIN11: C23.A JP23.3 L12.P$1
VIN12: C25.A JP25.3 L13.P$1
VIN13: C27.A JP27.3 L14.P$1
VIN14: C29.A JP29.3 L15.P$1
VIN15: C31.A JP31.3 L16.P$1
VIN16: C33.A JP33.3 L17.P$1
VIN17: C35.A JP35.3 L18.P$1
VIN18: C37.A JP37.3 L19.P$1
VIN19: C39.A JP39.3 L20.P$1
VIN20: C41.A JP41.3 L21.P$1
VIN21: C43.A JP43.3 L22.P$1
VIN22: C45.A JP45.3 L23.P$1
VIN23: C47.A JP47.3 L24.P$1
VIN24: C49.A JP49.3 L25.P$1
VIN25: C51.A JP51.3 L26.P$1
VIN26: C53.A JP53.3 L27.P$1
VIN27: C55.A JP55.3 L28.P$1
VIN28: C57.A JP57.3 L29.P$1
VIN29: C59.A JP59.3 L30.P$1
VIN30: C61.A JP61.3 L31.P$1
VIN31: C63.A JP63.3 L32.P$1
VIN32: C65.A JP65.3 L33.P$1
VIN33: C67.A JP67.3 L34.P$1
VIN34: C69.A JP69.3 L35.P$1
VIN35: C71.A JP71.3 L36.P$1
VIN36: C73.A JP73.3 L37.P$1
VIN37: C75.A JP75.3 L38.P$1
VIN38: C77.A JP77.3 L39.P$1
VIN39: C79.A JP79.3 L40.P$1
VOUT: C2.A D1.C JP1.2 U1.1 U1.2
VOUT1: C4.A D2.C JP3.2 U2.1 U2.2
VOUT2: C6.A D3.C JP5.2 U3.1 U3.2
VOUT3: C8.A D4.C JP7.2 U4.1 U4.2
VOUT4: C10.A D5.C JP9.2 U5.1 U5.2
VOUT5: C12.A D6.C JP11.2 U6.1 U6.2
VOUT6: C14.A D7.C JP13.2 U7.1 U7.2
VOUT7: C16.A D8.C JP15.2 U8.1 U8.2
VOUT8: C18.A D9.C JP17.2 U9.1 U9.2
VOUT9: C20.A D10.C JP19.2 U10.1 U10.2
VOUT10: C22.A D11.C JP21.2 U11.1 U11.2
VOUT11: C24.A D12.C JP23.2 U12.1 U12.2
VOUT12: C26.A D13.C JP25.2 U13.1 U13.2
VOUT13: C28.A D14.C JP27.2 U14.1 U14.2
VOUT14: C30.A D15.C JP29.2 U15.1 U15.2
VOUT15: C32.A D16.C JP31.2 U16.1 U16.2
VOUT16: C34.A D17.C JP33.2 U17.1 U17.2
VOUT17: C36.A D18.C JP35.2 U18.1 U18.2
VOUT18: C38.A D19.C JP37.2 U19.1 U19.2
VOUT19: C40.A D20.C JP39.2 U20.1 U20.2
VOUT20: C42.A D21.C JP41.2 U21.1 U21.2
VOUT21: C44.A D22.C JP43.2 U22.1 U22.2
VOUT22: C46.A D23.C JP45.2 U23.1 U23.2
VOUT23: C48.A D24.C JP47.2 U24.1 U24.2
VOUT24: C50.A D25.C JP49.2 U25.1 U25.2
VOUT25: C52.A D26.C JP51.2 U26.1 U26.2
VOUT26: C54.A D27.C JP53.2 U27.1 U27.2
VOUT27: C56.A D28.C JP55.2 U28.1 U28.2
VOUT28: C58.A D29.C JP57.2 U29.1 U29.2
VOUT29: C60.A D30.C JP59.2 U30.1 U30.2
VOUT30: C62.A D31.C JP61.2 U31.1 U31.2
VOUT31: C64.A D32.C JP63.2 U32.1 U32.2
VOUT32: C66.A D33.C JP65.2 U33.1 U33.2
VOUT33: C68.A D34.C JP67.2 U34.1 U34.2
VOUT34: C70.A D35.C JP69.2 U35.1 U35.2
VOUT35: C72.A D36.C JP71.2 U36.1 U36.2
VOUT36: C74.A D37.C JP73.2 U37.1 U37.2
VOUT37: C76.A D38.C JP75.2 U38.1 U38.2
VOUT38: C78.A D39.C JP77.2 U39.1 U39.2
VOUT39: C80.A D40.C JP79.2 U40.1 U40.2

## Tracks (layer width: path | path; a pad name or v marks a point on that pad's centre or on a via)
GND
  Top 1.27: JP1.1 9.4,8.13 8.64,8.89 8.64,13.72
  pour Top (isolate 0.305): 6.86,19.18 12.45,19.18 12.45,7.11 6.86,7.11
  pour Bottom (isolate 0.305): 6.86,6.86 6.86,23.37 19.56,23.37 19.56,6.86
GND1
  Top 1.27: JP3.1 22.61,8.13 21.84,8.89 21.84,13.72
  pour Top (isolate 0.305): 20.07,19.18 25.65,19.18 25.65,7.11 20.07,7.11
  pour Bottom (isolate 0.305): 20.07,6.86 20.07,23.37 32.77,23.37 32.77,6.86
GND2
  Top 1.27: JP5.1 35.81,8.13 35.05,8.89 35.05,13.72
  pour Top (isolate 0.305): 33.27,19.18 38.86,19.18 38.86,7.11 33.27,7.11
  pour Bottom (isolate 0.305): 33.27,6.86 33.27,23.37 45.97,23.37 45.97,6.86
GND3
  Top 1.27: JP7.1 49.02,8.13 48.26,8.89 48.26,13.72
  pour Top (isolate 0.305): 46.48,19.18 52.07,19.18 52.07,7.11 46.48,7.11
  pour Bottom (isolate 0.305): 46.48,6.86 46.48,23.37 59.18,23.37 59.18,6.86
GND4
  Top 1.27: JP9.1 62.23,8.13 61.47,8.89 61.47,13.72
  pour Top (isolate 0.305): 59.69,19.18 65.28,19.18 65.28,7.11 59.69,7.11
  pour Bottom (isolate 0.305): 59.69,6.86 59.69,23.37 72.39,23.37 72.39,6.86
GND5
  Top 1.27: JP11.1 75.44,8.13 74.68,8.89 74.68,13.72
  pour Top (isolate 0.305): 72.9,19.18 78.49,19.18 78.49,7.11 72.9,7.11
  pour Bottom (isolate 0.305): 72.9,6.86 72.9,23.37 85.6,23.37 85.6,6.86
GND6
  Top 1.27: JP13.1 88.65,8.13 87.88,8.89 87.88,13.72
  pour Top (isolate 0.305): 86.11,19.18 91.69,19.18 91.69,7.11 86.11,7.11
  pour Bottom (isolate 0.305): 86.11,6.86 86.11,23.37 98.81,23.37 98.81,6.86
GND7
  Top 1.27: JP15.1 101.85,8.13 101.09,8.89 101.09,13.72
  pour Top (isolate 0.305): 99.31,19.18 104.9,19.18 104.9,7.11 99.31,7.11
  pour Bottom (isolate 0.305): 99.31,6.86 99.31,23.37 112.01,23.37 112.01,6.86
GND8
  Top 1.27: JP17.1 9.4,25.15 8.64,25.91 8.64,30.73
  pour Top (isolate 0.305): 6.86,36.2 12.45,36.2 12.45,24.13 6.86,24.13
  pour Bottom (isolate 0.305): 6.86,23.88 6.86,40.39 19.56,40.39 19.56,23.88
GND9
  Top 1.27: JP19.1 22.61,25.15 21.84,25.91 21.84,30.73
  pour Top (isolate 0.305): 20.07,36.2 25.65,36.2 25.65,24.13 20.07,24.13
  pour Bottom (isolate 0.305): 20.07,23.88 20.07,40.39 32.77,40.39 32.77,23.88
GND10
  Top 1.27: JP21.1 35.81,25.15 35.05,25.91 35.05,30.73
  pour Top (isolate 0.305): 33.27,36.2 38.86,36.2 38.86,24.13 33.27,24.13
  pour Bottom (isolate 0.305): 33.27,23.88 33.27,40.39 45.97,40.39 45.97,23.88
GND11
  Top 1.27: JP23.1 49.02,25.15 48.26,25.91 48.26,30.73
  pour Top (isolate 0.305): 46.48,36.2 52.07,36.2 52.07,24.13 46.48,24.13
  pour Bottom (isolate 0.305): 46.48,23.88 46.48,40.39 59.18,40.39 59.18,23.88
GND12
  Top 1.27: JP25.1 62.23,25.15 61.47,25.91 61.47,30.73
  pour Top (isolate 0.305): 59.69,36.2 65.28,36.2 65.28,24.13 59.69,24.13
  pour Bottom (isolate 0.305): 59.69,23.88 59.69,40.39 72.39,40.39 72.39,23.88
GND13
  Top 1.27: JP27.1 75.44,25.15 74.68,25.91 74.68,30.73
  pour Top (isolate 0.305): 72.9,36.2 78.49,36.2 78.49,24.13 72.9,24.13
  pour Bottom (isolate 0.305): 72.9,23.88 72.9,40.39 85.6,40.39 85.6,23.88
GND14
  Top 1.27: JP29.1 88.65,25.15 87.88,25.91 87.88,30.73
  pour Top (isolate 0.305): 86.11,36.2 91.69,36.2 91.69,24.13 86.11,24.13
  pour Bottom (isolate 0.305): 86.11,23.88 86.11,40.39 98.81,40.39 98.81,23.88
GND15
  Top 1.27: JP31.1 101.85,25.15 101.09,25.91 101.09,30.73
  pour Top (isolate 0.305): 99.31,36.2 104.9,36.2 104.9,24.13 99.31,24.13
  pour Bottom (isolate 0.305): 99.31,23.88 99.31,40.39 112.01,40.39 112.01,23.88
GND16
  Top 1.27: JP33.1 9.4,42.16 8.64,42.93 8.64,47.75
  pour Top (isolate 0.305): 6.86,53.21 12.45,53.21 12.45,41.15 6.86,41.15
  pour Bottom (isolate 0.305): 6.86,40.89 6.86,57.4 19.56,57.4 19.56,40.89
GND17
  Top 1.27: JP35.1 22.61,42.16 21.84,42.93 21.84,47.75
  pour Top (isolate 0.305): 20.07,53.21 25.65,53.21 25.65,41.15 20.07,41.15
  pour Bottom (isolate 0.305): 20.07,40.89 20.07,57.4 32.77,57.4 32.77,40.89
GND18
  Top 1.27: JP37.1 35.81,42.16 35.05,42.93 35.05,47.75
  pour Top (isolate 0.305): 33.27,53.21 38.86,53.21 38.86,41.15 33.27,41.15
  pour Bottom (isolate 0.305): 33.27,40.89 33.27,57.4 45.97,57.4 45.97,40.89
GND19
  Top 1.27: JP39.1 49.02,42.16 48.26,42.93 48.26,47.75
  pour Top (isolate 0.305): 46.48,53.21 52.07,53.21 52.07,41.15 46.48,41.15
  pour Bottom (isolate 0.305): 46.48,40.89 46.48,57.4 59.18,57.4 59.18,40.89
GND20
  Top 1.27: JP41.1 62.23,42.16 61.47,42.93 61.47,47.75
  pour Top (isolate 0.305): 59.69,53.21 65.28,53.21 65.28,41.15 59.69,41.15
  pour Bottom (isolate 0.305): 59.69,40.89 59.69,57.4 72.39,57.4 72.39,40.89
GND21
  Top 1.27: JP43.1 75.44,42.16 74.68,42.93 74.68,47.75
  pour Top (isolate 0.305): 72.9,53.21 78.49,53.21 78.49,41.15 72.9,41.15
  pour Bottom (isolate 0.305): 72.9,40.89 72.9,57.4 85.6,57.4 85.6,40.89
GND22
  Top 1.27: JP45.1 88.65,42.16 87.88,42.93 87.88,47.75
  pour Top (isolate 0.305): 86.11,53.21 91.69,53.21 91.69,41.15 86.11,41.15
  pour Bottom (isolate 0.305): 86.11,40.89 86.11,57.4 98.81,57.4 98.81,40.89
GND23
  Top 1.27: JP47.1 101.85,42.16 101.09,42.93 101.09,47.75
  pour Top (isolate 0.305): 99.31,53.21 104.9,53.21 104.9,41.15 99.31,41.15
  pour Bottom (isolate 0.305): 99.31,40.89 99.31,57.4 112.01,57.4 112.01,40.89
GND24
  Top 1.27: JP49.1 9.4,59.18 8.64,59.94 8.64,64.77
  pour Top (isolate 0.305): 6.86,70.23 12.45,70.23 12.45,58.17 6.86,58.17
  pour Bottom (isolate 0.305): 6.86,57.91 6.86,74.42 19.56,74.42 19.56,57.91
GND25
  Top 1.27: JP51.1 22.61,59.18 21.84,59.94 21.84,64.77
  pour Top (isolate 0.305): 20.07,70.23 25.65,70.23 25.65,58.17 20.07,58.17
  pour Bottom (isolate 0.305): 20.07,57.91 20.07,74.42 32.77,74.42 32.77,57.91
GND26
  Top 1.27: JP53.1 35.81,59.18 35.05,59.94 35.05,64.77
  pour Top (isolate 0.305): 33.27,70.23 38.86,70.23 38.86,58.17 33.27,58.17
  pour Bottom (isolate 0.305): 33.27,57.91 33.27,74.42 45.97,74.42 45.97,57.91
GND27
  Top 1.27: JP55.1 49.02,59.18 48.26,59.94 48.26,64.77
  pour Top (isolate 0.305): 46.48,70.23 52.07,70.23 52.07,58.17 46.48,58.17
  pour Bottom (isolate 0.305): 46.48,57.91 46.48,74.42 59.18,74.42 59.18,57.91
GND28
  Top 1.27: JP57.1 62.23,59.18 61.47,59.94 61.47,64.77
  pour Top (isolate 0.305): 59.69,70.23 65.28,70.23 65.28,58.17 59.69,58.17
  pour Bottom (isolate 0.305): 59.69,57.91 59.69,74.42 72.39,74.42 72.39,57.91
GND29
  Top 1.27: JP59.1 75.44,59.18 74.68,59.94 74.68,64.77
  pour Top (isolate 0.305): 72.9,70.23 78.49,70.23 78.49,58.17 72.9,58.17
  pour Bottom (isolate 0.305): 72.9,57.91 72.9,74.42 85.6,74.42 85.6,57.91
GND30
  Top 1.27: JP61.1 88.65,59.18 87.88,59.94 87.88,64.77
  pour Top (isolate 0.305): 86.11,70.23 91.69,70.23 91.69,58.17 86.11,58.17
  pour Bottom (isolate 0.305): 86.11,57.91 86.11,74.42 98.81,74.42 98.81,57.91
GND31
  Top 1.27: JP63.1 101.85,59.18 101.09,59.94 101.09,64.77
  pour Top (isolate 0.305): 99.31,70.23 104.9,70.23 104.9,58.17 99.31,58.17
  pour Bottom (isolate 0.305): 99.31,57.91 99.31,74.42 112.01,74.42 112.01,57.91
GND32
  Top 1.27: JP65.1 9.4,76.2 8.64,76.96 8.64,81.79
  pour Top (isolate 0.305): 6.86,87.25 12.45,87.25 12.45,75.18 6.86,75.18
  pour Bottom (isolate 0.305): 6.86,74.93 6.86,91.44 19.56,91.44 19.56,74.93
GND33
  Top 1.27: JP67.1 22.61,76.2 21.84,76.96 21.84,81.79
  pour Top (isolate 0.305): 20.07,87.25 25.65,87.25 25.65,75.18 20.07,75.18
  pour Bottom (isolate 0.305): 20.07,74.93 20.07,91.44 32.77,91.44 32.77,74.93
GND34
  Top 1.27: JP69.1 35.81,76.2 35.05,76.96 35.05,81.79
  pour Top (isolate 0.305): 33.27,87.25 38.86,87.25 38.86,75.18 33.27,75.18
  pour Bottom (isolate 0.305): 33.27,74.93 33.27,91.44 45.97,91.44 45.97,74.93
GND35
  Top 1.27: JP71.1 49.02,76.2 48.26,76.96 48.26,81.79
  pour Top (isolate 0.305): 46.48,87.25 52.07,87.25 52.07,75.18 46.48,75.18
  pour Bottom (isolate 0.305): 46.48,74.93 46.48,91.44 59.18,91.44 59.18,74.93
GND36
  Top 1.27: JP73.1 62.23,76.2 61.47,76.96 61.47,81.79
  pour Top (isolate 0.305): 59.69,87.25 65.28,87.25 65.28,75.18 59.69,75.18
  pour Bottom (isolate 0.305): 59.69,74.93 59.69,91.44 72.39,91.44 72.39,74.93
GND37
  Top 1.27: JP75.1 75.44,76.2 74.68,76.96 74.68,81.79
  pour Top (isolate 0.305): 72.9,87.25 78.49,87.25 78.49,75.18 72.9,75.18
  pour Bottom (isolate 0.305): 72.9,74.93 72.9,91.44 85.6,91.44 85.6,74.93
GND38
  Top 1.27: JP77.1 88.65,76.2 87.88,76.96 87.88,81.79
  pour Top (isolate 0.305): 86.11,87.25 91.69,87.25 91.69,75.18 86.11,75.18
  pour Bottom (isolate 0.305): 86.11,74.93 86.11,91.44 98.81,91.44 98.81,74.93
GND39
  Top 1.27: JP79.1 101.85,76.2 101.09,76.96 101.09,81.79
  pour Top (isolate 0.305): 99.31,87.25 104.9,87.25 104.9,75.18 99.31,75.18
  pour Bottom (isolate 0.305): 99.31,74.93 99.31,91.44 112.01,91.44 112.01,74.93
N$1
  Top 1.27: D2.A 28.96,15.88 L2.P$2 28.96,15.78 U2.5
  pour Top (isolate 0.305): 27.05,19.18 32.77,19.18 32.77,14.48 27.05,14.48
N$2
  Top 1.27: D3.A 42.16,15.88 L3.P$2 42.16,15.78 U3.5
  pour Top (isolate 0.305): 40.26,19.18 45.97,19.18 45.97,14.48 40.26,14.48
N$3
  Top 1.27: D1.A 15.75,15.88 L1.P$2 15.75,15.78 U1.5
  pour Top (isolate 0.305): 13.84,19.18 19.56,19.18 19.56,14.48 13.84,14.48
N$4
  Top 1.27: D4.A 55.37,15.88 L4.P$2 55.37,15.78 U4.5
  pour Top (isolate 0.305): 53.47,19.18 59.18,19.18 59.18,14.48 53.47,14.48
N$5
  Top 1.27: D5.A 68.58,15.88 L5.P$2 68.58,15.78 U5.5
  pour Top (isolate 0.305): 66.67,19.18 72.39,19.18 72.39,14.48 66.67,14.48
N$6
  Top 1.27: D6.A 81.79,15.88 L6.P$2 81.79,15.78 U6.5
  pour Top (isolate 0.305): 79.88,19.18 85.6,19.18 85.6,14.48 79.88,14.48
N$7
  Top 1.27: D7.A 95,15.88 L7.P$2 95,15.78 U7.5
  pour Top (isolate 0.305): 93.09,19.18 98.81,19.18 98.81,14.48 93.09,14.48
N$8
  Top 1.27: D8.A 108.2,15.88 L8.P$2 108.2,15.78 U8.5
  pour Top (isolate 0.305): 106.3,19.18 112.01,19.18 112.01,14.48 106.3,14.48
N$9
  Top 1.27: D9.A 15.75,32.9 L9.P$2 15.75,32.8 U9.5
  pour Top (isolate 0.305): 13.84,36.2 19.56,36.2 19.56,31.5 13.84,31.5
N$10
  Top 1.27: D10.A 28.96,32.9 L10.P$2 28.96,32.8 U10.5
  pour Top (isolate 0.305): 27.05,36.2 32.77,36.2 32.77,31.5 27.05,31.5
N$11
  Top 1.27: D11.A 42.16,32.9 L11.P$2 42.16,32.8 U11.5
  pour Top (isolate 0.305): 40.26,36.2 45.97,36.2 45.97,31.5 40.26,31.5
N$12
  Top 1.27: D12.A 55.37,32.9 L12.P$2 55.37,32.8 U12.5
  pour Top (isolate 0.305): 53.47,36.2 59.18,36.2 59.18,31.5 53.47,31.5
N$13
  Top 1.27: D13.A 68.58,32.9 L13.P$2 68.58,32.8 U13.5
  pour Top (isolate 0.305): 66.67,36.2 72.39,36.2 72.39,31.5 66.67,31.5
N$14
  Top 1.27: D14.A 81.79,32.9 L14.P$2 81.79,32.8 U14.5
  pour Top (isolate 0.305): 79.88,36.2 85.6,36.2 85.6,31.5 79.88,31.5
N$15
  Top 1.27: D15.A 95,32.9 L15.P$2 95,32.8 U15.5
  pour Top (isolate 0.305): 93.09,36.2 98.81,36.2 98.81,31.5 93.09,31.5
N$16
  Top 1.27: D16.A 108.2,32.9 L16.P$2 108.2,32.8 U16.5
  pour Top (isolate 0.305): 106.3,36.2 112.01,36.2 112.01,31.5 106.3,31.5
N$17
  Top 1.27: D17.A 15.75,49.92 L17.P$2 15.75,49.81 U17.5
  pour Top (isolate 0.305): 13.84,53.21 19.56,53.21 19.56,48.51 13.84,48.51
N$18
  Top 1.27: D18.A 28.96,49.92 L18.P$2 28.96,49.81 U18.5
  pour Top (isolate 0.305): 27.05,53.21 32.77,53.21 32.77,48.51 27.05,48.51
N$19
  Top 1.27: D19.A 42.16,49.92 L19.P$2 42.16,49.81 U19.5
  pour Top (isolate 0.305): 40.26,53.21 45.97,53.21 45.97,48.51 40.26,48.51
N$20
  Top 1.27: D20.A 55.37,49.92 L20.P$2 55.37,49.81 U20.5
  pour Top (isolate 0.305): 53.47,53.21 59.18,53.21 59.18,48.51 53.47,48.51
N$21
  Top 1.27: D21.A 68.58,49.92 L21.P$2 68.58,49.81 U21.5
  pour Top (isolate 0.305): 66.67,53.21 72.39,53.21 72.39,48.51 66.67,48.51
N$22
  Top 1.27: D22.A 81.79,49.92 L22.P$2 81.79,49.81 U22.5
  pour Top (isolate 0.305): 79.88,53.21 85.6,53.21 85.6,48.51 79.88,48.51
N$23
  Top 1.27: D23.A 95,49.92 L23.P$2 95,49.81 U23.5
  pour Top (isolate 0.305): 93.09,53.21 98.81,53.21 98.81,48.51 93.09,48.51
N$24
  Top 1.27: D24.A 108.2,49.92 L24.P$2 108.2,49.81 U24.5
  pour Top (isolate 0.305): 106.3,53.21 112.01,53.21 112.01,48.51 106.3,48.51
N$25
  Top 1.27: D25.A 15.75,66.94 L25.P$2 15.75,66.83 U25.5
  pour Top (isolate 0.305): 13.84,70.23 19.56,70.23 19.56,65.53 13.84,65.53
N$26
  Top 1.27: D26.A 28.96,66.94 L26.P$2 28.96,66.83 U26.5
  pour Top (isolate 0.305): 27.05,70.23 32.77,70.23 32.77,65.53 27.05,65.53
N$27
  Top 1.27: D27.A 42.16,66.94 L27.P$2 42.16,66.83 U27.5
  pour Top (isolate 0.305): 40.26,70.23 45.97,70.23 45.97,65.53 40.26,65.53
N$28
  Top 1.27: D28.A 55.37,66.94 L28.P$2 55.37,66.83 U28.5
  pour Top (isolate 0.305): 53.47,70.23 59.18,70.23 59.18,65.53 53.47,65.53
N$29
  Top 1.27: D29.A 68.58,66.94 L29.P$2 68.58,66.83 U29.5
  pour Top (isolate 0.305): 66.67,70.23 72.39,70.23 72.39,65.53 66.67,65.53
N$30
  Top 1.27: D30.A 81.79,66.94 L30.P$2 81.79,66.83 U30.5
  pour Top (isolate 0.305): 79.88,70.23 85.6,70.23 85.6,65.53 79.88,65.53
N$31
  Top 1.27: D31.A 95,66.94 L31.P$2 95,66.83 U31.5
  pour Top (isolate 0.305): 93.09,70.23 98.81,70.23 98.81,65.53 93.09,65.53
N$32
  Top 1.27: D32.A 108.2,66.94 L32.P$2 108.2,66.83 U32.5
  pour Top (isolate 0.305): 106.3,70.23 112.01,70.23 112.01,65.53 106.3,65.53
N$33
  Top 1.27: D33.A 15.75,83.96 L33.P$2 15.75,83.85 U33.5
  pour Top (isolate 0.305): 13.84,87.25 19.56,87.25 19.56,82.55 13.84,82.55
N$34
  Top 1.27: D34.A 28.96,83.96 L34.P$2 28.96,83.85 U34.5
  pour Top (isolate 0.305): 27.05,87.25 32.77,87.25 32.77,82.55 27.05,82.55
N$35
  Top 1.27: D35.A 42.16,83.96 L35.P$2 42.16,83.85 U35.5
  pour Top (isolate 0.305): 40.26,87.25 45.97,87.25 45.97,82.55 40.26,82.55
N$36
  Top 1.27: D36.A 55.37,83.96 L36.P$2 55.37,83.85 U36.5
  pour Top (isolate 0.305): 53.47,87.25 59.18,87.25 59.18,82.55 53.47,82.55
N$37
  Top 1.27: D37.A 68.58,83.96 L37.P$2 68.58,83.85 U37.5
  pour Top (isolate 0.305): 66.67,87.25 72.39,87.25 72.39,82.55 66.67,82.55
N$38
  Top 1.27: D38.A 81.79,83.96 L38.P$2 81.79,83.85 U38.5
  pour Top (isolate 0.305): 79.88,87.25 85.6,87.25 85.6,82.55 79.88,82.55
N$39
  Top 1.27: D39.A 95,83.96 L39.P$2 95,83.85 U39.5
  pour Top (isolate 0.305): 93.09,87.25 98.81,87.25 98.81,82.55 93.09,82.55
N$40
  Top 1.27: D40.A 108.2,83.96 L40.P$2 108.2,83.85 U40.5
  pour Top (isolate 0.305): 106.3,87.25 112.01,87.25 112.01,82.55 106.3,82.55
VIN
  Top 1.27: L1.P$1 JP1.3 | 15.73,11.3 11.17,11.3 C1.A
  Top 1.524: 15.73,11.3 L1.P$1
VIN1
  Top 1.27: L2.P$1 JP3.3 | 28.94,11.3 24.38,11.3 C3.A
  Top 1.524: 28.94,11.3 L2.P$1
VIN2
  Top 1.27: L3.P$1 JP5.3 | 42.15,11.3 37.59,11.3 C5.A
  Top 1.524: 42.15,11.3 L3.P$1
VIN3
  Top 1.27: L4.P$1 JP7.3 | 55.36,11.3 50.8,11.3 C7.A
  Top 1.524: 55.36,11.3 L4.P$1
VIN4
  Top 1.27: L5.P$1 JP9.3 | 68.56,11.3 64,11.3 C9.A
  Top 1.524: 68.56,11.3 L5.P$1
VIN5
  Top 1.27: L6.P$1 JP11.3 | 81.77,11.3 77.21,11.3 C11.A
  Top 1.524: 81.77,11.3 L6.P$1
VIN6
  Top 1.27: L7.P$1 JP13.3 | 94.98,11.3 90.42,11.3 C13.A
  Top 1.524: 94.98,11.3 L7.P$1
VIN7
  Top 1.27: L8.P$1 JP15.3 | 108.19,11.3 103.63,11.3 C15.A
  Top 1.524: 108.19,11.3 L8.P$1
VIN8
  Top 1.27: L9.P$1 JP17.3 | 15.73,28.32 11.17,28.32 C17.A
  Top 1.524: 15.73,28.32 L9.P$1
VIN9
  Top 1.27: L10.P$1 JP19.3 | 28.94,28.32 24.38,28.32 C19.A
  Top 1.524: 28.94,28.32 L10.P$1
VIN10
  Top 1.27: L11.P$1 JP21.3 | 42.15,28.32 37.59,28.32 C21.A
  Top 1.524: 42.15,28.32 L11.P$1
VIN11
  Top 1.27: L12.P$1 JP23.3 | 55.36,28.32 50.8,28.32 C23.A
  Top 1.524: 55.36,28.32 L12.P$1
VIN12
  Top 1.27: L13.P$1 JP25.3 | 68.56,28.32 64,28.32 C25.A
  Top 1.524: 68.56,28.32 L13.P$1
VIN13
  Top 1.27: L14.P$1 JP27.3 | 81.77,28.32 77.21,28.32 C27.A
  Top 1.524: 81.77,28.32 L14.P$1
VIN14
  Top 1.27: L15.P$1 JP29.3 | 94.98,28.32 90.42,28.32 C29.A
  Top 1.524: 94.98,28.32 L15.P$1
VIN15
  Top 1.27: L16.P$1 JP31.3 | 108.19,28.32 103.63,28.32 C31.A
  Top 1.524: 108.19,28.32 L16.P$1
VIN16
  Top 1.27: L17.P$1 JP33.3 | 15.73,45.34 11.17,45.34 C33.A
  Top 1.524: 15.73,45.34 L17.P$1
VIN17
  Top 1.27: L18.P$1 JP35.3 | 28.94,45.34 24.38,45.34 C35.A
  Top 1.524: 28.94,45.34 L18.P$1
VIN18
  Top 1.27: L19.P$1 JP37.3 | 42.15,45.34 37.59,45.34 C37.A
  Top 1.524: 42.15,45.34 L19.P$1
VIN19
  Top 1.27: L20.P$1 JP39.3 | 55.36,45.34 50.8,45.34 C39.A
  Top 1.524: 55.36,45.34 L20.P$1
VIN20
  Top 1.27: L21.P$1 JP41.3 | 68.56,45.34 64,45.34 C41.A
  Top 1.524: 68.56,45.34 L21.P$1
VIN21
  Top 1.27: L22.P$1 JP43.3 | 81.77,45.34 77.21,45.34 C43.A
  Top 1.524: 81.77,45.34 L22.P$1
VIN22
  Top 1.27: L23.P$1 JP45.3 | 94.98,45.34 90.42,45.34 C45.A
  Top 1.524: 94.98,45.34 L23.P$1
VIN23
  Top 1.27: L24.P$1 JP47.3 | 108.19,45.34 103.63,45.34 C47.A
  Top 1.524: 108.19,45.34 L24.P$1
VIN24
  Top 1.27: L25.P$1 JP49.3 | 15.73,62.36 11.17,62.36 C49.A
  Top 1.524: 15.73,62.36 L25.P$1
VIN25
  Top 1.27: L26.P$1 JP51.3 | 28.94,62.36 24.38,62.36 C51.A
  Top 1.524: 28.94,62.36 L26.P$1
VIN26
  Top 1.27: L27.P$1 JP53.3 | 42.15,62.36 37.59,62.36 C53.A
  Top 1.524: 42.15,62.36 L27.P$1
VIN27
  Top 1.27: L28.P$1 JP55.3 | 55.36,62.36 50.8,62.36 C55.A
  Top 1.524: 55.36,62.36 L28.P$1
VIN28
  Top 1.27: L29.P$1 JP57.3 | 68.56,62.36 64,62.36 C57.A
  Top 1.524: 68.56,62.36 L29.P$1
VIN29
  Top 1.27: L30.P$1 JP59.3 | 81.77,62.36 77.21,62.36 C59.A
  Top 1.524: 81.77,62.36 L30.P$1
VIN30
  Top 1.27: L31.P$1 JP61.3 | 94.98,62.36 90.42,62.36 C61.A
  Top 1.524: 94.98,62.36 L31.P$1
VIN31
  Top 1.27: L32.P$1 JP63.3 | 108.19,62.36 103.63,62.36 C63.A
  Top 1.524: 108.19,62.36 L32.P$1
VIN32
  Top 1.27: L33.P$1 JP65.3 | 15.73,79.38 11.17,79.38 C65.A
  Top 1.524: 15.73,79.38 L33.P$1
VIN33
  Top 1.27: L34.P$1 JP67.3 | 28.94,79.38 24.38,79.38 C67.A
  Top 1.524: 28.94,79.38 L34.P$1
VIN34
  Top 1.27: L35.P$1 JP69.3 | 42.15,79.38 37.59,79.38 C69.A
  Top 1.524: 42.15,79.38 L35.P$1
VIN35
  Top 1.27: L36.P$1 JP71.3 | 55.36,79.38 50.8,79.38 C71.A
  Top 1.524: 55.36,79.38 L36.P$1
VIN36
  Top 1.27: L37.P$1 JP73.3 | 68.56,79.38 64,79.38 C73.A
  Top 1.524: 68.56,79.38 L37.P$1
VIN37
  Top 1.27: L38.P$1 JP75.3 | 81.77,79.38 77.21,79.38 C75.A
  Top 1.524: 81.77,79.38 L38.P$1
VIN38
  Top 1.27: L39.P$1 JP77.3 | 94.98,79.38 90.42,79.38 C77.A
  Top 1.524: 94.98,79.38 L39.P$1
VIN39
  Top 1.27: L40.P$1 JP79.3 | 108.19,79.38 103.63,79.38 C79.A
  Top 1.524: 108.19,79.38 L40.P$1
VOUT  (via drill 0.76)
  Bottom 1.27: JP1.2 v13.21,21.59
  pour Top (isolate 0.305): 19.56,23.37 6.86,23.37 6.86,20.19 19.56,20.19
VOUT1  (via drill 0.76)
  Bottom 1.27: JP3.2 v26.42,21.59
  pour Top (isolate 0.305): 32.77,23.37 20.07,23.37 20.07,20.19 32.77,20.19
VOUT2  (via drill 0.76)
  Bottom 1.27: JP5.2 v39.62,21.59
  pour Top (isolate 0.305): 45.97,23.37 33.27,23.37 33.27,20.19 45.97,20.19
VOUT3  (via drill 0.76)
  Bottom 1.27: JP7.2 v52.83,21.59
  pour Top (isolate 0.305): 59.18,23.37 46.48,23.37 46.48,20.19 59.18,20.19
VOUT4  (via drill 0.76)
  Bottom 1.27: JP9.2 v66.04,21.59
  pour Top (isolate 0.305): 72.39,23.37 59.69,23.37 59.69,20.19 72.39,20.19
VOUT5  (via drill 0.76)
  Bottom 1.27: JP11.2 v79.25,21.59
  pour Top (isolate 0.305): 85.6,23.37 72.9,23.37 72.9,20.19 85.6,20.19
VOUT6  (via drill 0.76)
  Bottom 1.27: JP13.2 v92.46,21.59
  pour Top (isolate 0.305): 98.81,23.37 86.11,23.37 86.11,20.19 98.81,20.19
VOUT7  (via drill 0.76)
  Bottom 1.27: JP15.2 v105.66,21.59
  pour Top (isolate 0.305): 112.01,23.37 99.31,23.37 99.31,20.19 112.01,20.19
VOUT8  (via drill 0.76)
  Bottom 1.27: JP17.2 v13.21,38.61
  pour Top (isolate 0.305): 19.56,40.39 6.86,40.39 6.86,37.21 19.56,37.21
VOUT9  (via drill 0.76)
  Bottom 1.27: JP19.2 v26.42,38.61
  pour Top (isolate 0.305): 32.77,40.39 20.07,40.39 20.07,37.21 32.77,37.21
VOUT10  (via drill 0.76)
  Bottom 1.27: JP21.2 v39.62,38.61
  pour Top (isolate 0.305): 45.97,40.39 33.27,40.39 33.27,37.21 45.97,37.21
VOUT11  (via drill 0.76)
  Bottom 1.27: JP23.2 v52.83,38.61
  pour Top (isolate 0.305): 59.18,40.39 46.48,40.39 46.48,37.21 59.18,37.21
VOUT12  (via drill 0.76)
  Bottom 1.27: JP25.2 v66.04,38.61
  pour Top (isolate 0.305): 72.39,40.39 59.69,40.39 59.69,37.21 72.39,37.21
VOUT13  (via drill 0.76)
  Bottom 1.27: JP27.2 v79.25,38.61
  pour Top (isolate 0.305): 85.6,40.39 72.9,40.39 72.9,37.21 85.6,37.21
VOUT14  (via drill 0.76)
  Bottom 1.27: JP29.2 v92.46,38.61
  pour Top (isolate 0.305): 98.81,40.39 86.11,40.39 86.11,37.21 98.81,37.21
VOUT15  (via drill 0.76)
  Bottom 1.27: JP31.2 v105.66,38.61
  pour Top (isolate 0.305): 112.01,40.39 99.31,40.39 99.31,37.21 112.01,37.21
VOUT16  (via drill 0.76)
  Bottom 1.27: JP33.2 v13.21,55.63
  pour Top (isolate 0.305): 19.56,57.4 6.86,57.4 6.86,54.23 19.56,54.23
VOUT17  (via drill 0.76)
  Bottom 1.27: JP35.2 v26.42,55.63
  pour Top (isolate 0.305): 32.77,57.4 20.07,57.4 20.07,54.23 32.77,54.23
VOUT18  (via drill 0.76)
  Bottom 1.27: JP37.2 v39.62,55.63
  pour Top (isolate 0.305): 45.97,57.4 33.27,57.4 33.27,54.23 45.97,54.23
VOUT19  (via drill 0.76)
  Bottom 1.27: JP39.2 v52.83,55.63
  pour Top (isolate 0.305): 59.18,57.4 46.48,57.4 46.48,54.23 59.18,54.23
VOUT20  (via drill 0.76)
  Bottom 1.27: JP41.2 v66.04,55.63
  pour Top (isolate 0.305): 72.39,57.4 59.69,57.4 59.69,54.23 72.39,54.23
VOUT21  (via drill 0.76)
  Bottom 1.27: JP43.2 v79.25,55.63
  pour Top (isolate 0.305): 85.6,57.4 72.9,57.4 72.9,54.23 85.6,54.23
VOUT22  (via drill 0.76)
  Bottom 1.27: JP45.2 v92.46,55.63
  pour Top (isolate 0.305): 98.81,57.4 86.11,57.4 86.11,54.23 98.81,54.23
VOUT23  (via drill 0.76)
  Bottom 1.27: JP47.2 v105.66,55.63
  pour Top (isolate 0.305): 112.01,57.4 99.31,57.4 99.31,54.23 112.01,54.23
VOUT24  (via drill 0.76)
  Bottom 1.27: JP49.2 v13.21,72.64
  pour Top (isolate 0.305): 19.56,74.42 6.86,74.42 6.86,71.25 19.56,71.25
VOUT25  (via drill 0.76)
  Bottom 1.27: JP51.2 v26.42,72.64
  pour Top (isolate 0.305): 32.77,74.42 20.07,74.42 20.07,71.25 32.77,71.25
VOUT26  (via drill 0.76)
  Bottom 1.27: JP53.2 v39.62,72.64
  pour Top (isolate 0.305): 45.97,74.42 33.27,74.42 33.27,71.25 45.97,71.25
VOUT27  (via drill 0.76)
  Bottom 1.27: JP55.2 v52.83,72.64
  pour Top (isolate 0.305): 59.18,74.42 46.48,74.42 46.48,71.25 59.18,71.25
VOUT28  (via drill 0.76)
  Bottom 1.27: JP57.2 v66.04,72.64
  pour Top (isolate 0.305): 72.39,74.42 59.69,74.42 59.69,71.25 72.39,71.25
VOUT29  (via drill 0.76)
  Bottom 1.27: JP59.2 v79.25,72.64
  pour Top (isolate 0.305): 85.6,74.42 72.9,74.42 72.9,71.25 85.6,71.25
VOUT30  (via drill 0.76)
  Bottom 1.27: JP61.2 v92.46,72.64
  pour Top (isolate 0.305): 98.81,74.42 86.11,74.42 86.11,71.25 98.81,71.25
VOUT31  (via drill 0.76)
  Bottom 1.27: JP63.2 v105.66,72.64
  pour Top (isolate 0.305): 112.01,74.42 99.31,74.42 99.31,71.25 112.01,71.25
VOUT32  (via drill 0.76)
  Bottom 1.27: JP65.2 v13.21,89.66
  pour Top (isolate 0.305): 19.56,91.44 6.86,91.44 6.86,88.27 19.56,88.27
VOUT33  (via drill 0.76)
  Bottom 1.27: JP67.2 v26.42,89.66
  pour Top (isolate 0.305): 32.77,91.44 20.07,91.44 20.07,88.27 32.77,88.27
VOUT34  (via drill 0.76)
  Bottom 1.27: JP69.2 v39.62,89.66
  pour Top (isolate 0.305): 45.97,91.44 33.27,91.44 33.27,88.27 45.97,88.27
VOUT35  (via drill 0.76)
  Bottom 1.27: JP71.2 v52.83,89.66
  pour Top (isolate 0.305): 59.18,91.44 46.48,91.44 46.48,88.27 59.18,88.27
VOUT36  (via drill 0.76)
  Bottom 1.27: JP73.2 v66.04,89.66
  pour Top (isolate 0.305): 72.39,91.44 59.69,91.44 59.69,88.27 72.39,88.27
VOUT37  (via drill 0.76)
  Bottom 1.27: JP75.2 v79.25,89.66
  pour Top (isolate 0.305): 85.6,91.44 72.9,91.44 72.9,88.27 85.6,88.27
VOUT38  (via drill 0.76)
  Bottom 1.27: JP77.2 v92.46,89.66
  pour Top (isolate 0.305): 98.81,91.44 86.11,91.44 86.11,88.27 98.81,88.27
VOUT39  (via drill 0.76)
  Bottom 1.27: JP79.2 v105.66,89.66
  pour Top (isolate 0.305): 112.01,91.44 99.31,91.44 99.31,88.27 112.01,88.27

## Text on the board
Bottom: V10 | V10 | V10 | V10 | V10 | V10 | V10 | V10 | V10 | V10 | V10 | V10 | V10 | V10 | V10 | V10 | V10 | V10 | V10 | V10 | V10 | V10 | V10 | V10 | V10 | V10 | V10 | V10 | V10 | V10 | V10 | V10 | V10 | V10 | V10 | V10 | V10 | V10 | V10 | V10
bPlace: GND | 3.3V OUT | 1-3V IN | GND | 3.3V OUT | 1-3V IN | GND | 3.3V OUT | 1-3V IN | GND | 3.3V OUT | 1-3V IN | GND | 3.3V OUT | 1-3V IN | GND | 3.3V OUT | 1-3V IN | GND | 3.3V OUT | 1-3V IN | GND | 3.3V OUT | 1-3V IN | GND | 3.3V OUT | 1-3V IN | GND | 3.3V OUT | 1-3V IN | GND | 3.3V OUT | 1-3V IN | GND | 3.3V OUT | 1-3V IN | GND | 3.3V OUT | 1-3V IN | GND | 3.3V OUT | 1-3V IN | GND | 3.3V OUT | 1-3V IN | GND | 3.3V OUT | 1-3V IN | GND | 3.3V OUT | 1-3V IN | GND | 3.3V OUT | 1-3V IN | GND | 3.3V OUT | 1-3V IN | GND | 3.3V OUT | 1-3V IN | GND | 3.3V OUT | 1-3V IN | GND | 3.3V OUT | 1-3V IN | GND | 3.3V OUT | 1-3V IN | GND | 3.3V OUT | 1-3V IN | GND | 3.3V OUT | 1-3V IN | GND | 3.3V OUT | 1-3V IN | GND | 3.3V OUT | 1-3V IN | GND | 3.3V OUT | 1-3V IN | GND | 3.3V OUT | 1-3V IN | GND | 3.3V OUT | 1-3V IN | GND | 3.3V OUT | 1-3V IN | GND | 3.3V OUT | 1-3V IN | GND | 3.3V OUT | 1-3V IN | GND | 3.3V OUT | 1-3V IN | GND | 3.3V OUT | 1-3V IN | GND | 3.3V OUT | 1-3V IN | GND | 3.3V OUT | 1-3V IN | GND | 3.3V OUT | 1-3V IN | GND | 3.3V OUT | 1-3V IN | GND | 3.3V OUT | 1-3V IN